# Altium PCB PCB1.PcbDoc (part 2 of 3)
Units mm, origin at the board's own origin, x right, y up, seen from the top; angles counter-clockwise.
Board outline 21.72 x 226.57 mm, 2 copper layers (Top Layer, Bottom Layer); 37 components, 26 nets, 124 pads, 11 vias.
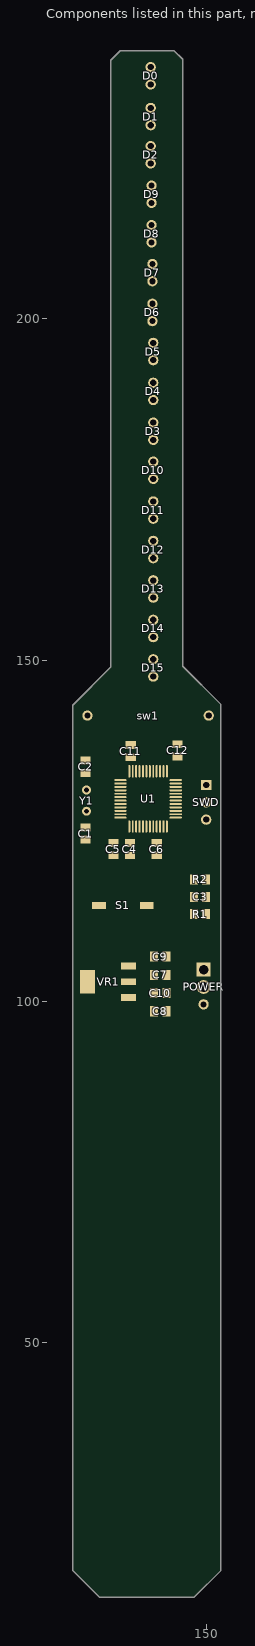
[diagram p2: the components of this part, seen from the top]

## Via types
v1: diameter 0.508, hole 0.305, Top Layer to Bottom Layer, 11 vias

## Nets (pads, with @x,y where several pads share a name; then routed paths per layer and width w, separated by ;. In a path a pad name is that pad's centre, name@x,y a point inside that pad or via, vN(x,y) a via of type N, cw(c..) or ccw(c..) an arc to the next point about the centre after c; other vN are vias at no path point) (continued)
copper on no net: (continued)
  Top Layer w0.076: 135.153,69.139 136.22,69.139 ; 135.153,69.215 136.144,69.215 ; 135.153,69.291 136.144,69.291 ; 135.153,69.367 136.144,69.367 ; 135.153,69.444 136.068,69.444 ; 135.153,69.52 136.068,69.52 ; 135.153,69.596 135.915,69.596 ; 135.153,69.672 135.915,69.672 ; 135.153,69.748 135.839,69.748 ; 135.153,69.825 135.839,69.825 ; 135.153,69.901 135.763,69.901 ; 135.153,69.977 135.763,69.977 ; 135.153,70.053 135.763,70.053 ; 135.23,68.91 136.22,68.91 ; 135.23,68.986 136.22,68.986 ; 135.23,69.063 136.22,69.063 ; 135.23,70.129 135.763,70.129 ; 135.23,70.206 135.763,70.206 ; 135.23,70.282 135.763,70.282 ; 135.306,68.682 136.22,68.682 ; 135.306,68.758 136.22,68.758 ; 135.306,68.834 136.22,68.834 ; 135.306,70.358 135.763,70.358 ; 135.306,70.434 135.763,70.434 ; 135.306,70.51 135.763,70.51 ; 135.306,70.587 135.763,70.587 ; 135.306,70.663 135.763,70.663 ; 135.382,68.529 136.22,68.529 ; 135.382,68.605 136.22,68.605 ; 135.382,70.739 135.763,70.739 ; 135.382,70.815 135.763,70.815 ; 135.458,68.377 136.22,68.377 ; 135.458,68.453 136.22,68.453 ; 135.458,70.891 135.763,70.891 ; 135.458,70.968 135.763,70.968 ; 135.458,71.044 135.763,71.044 ; 135.534,68.301 136.22,68.301 ; 135.534,71.12 135.687,71.12 ; 135.611,68.224 136.22,68.224 ; 135.611,71.196 135.687,71.196 ; 135.687,68.072 136.373,68.072 ; 135.687,68.148 136.296,68.148 ; 135.763,67.92 136.373,67.92 ; 135.763,67.996 136.373,67.996 ; 135.915,67.615 136.754,67.615 ; 135.915,67.691 136.677,67.691 ; 135.915,67.767 136.525,67.767 ; 135.915,67.843 136.525,67.843 ; 135.992,67.462 136.982,67.462 ; 135.992,67.539 136.906,67.539 ; 135.992,70.129 136.068,70.129 ; 135.992,70.206 136.068,70.206 ; 135.992,70.282 136.068,70.282 ; 135.992,70.358 136.068,70.358 ; 135.992,70.434 136.144,70.434 ; 135.992,70.51 136.144,70.51 ; 135.992,70.587 136.22,70.587 ; 135.992,70.663 136.22,70.663 ; 135.992,70.739 136.22,70.739 ; 135.992,70.815 136.22,70.815 ; 135.992,70.891 136.296,70.891 ; 135.992,70.968 136.296,70.968 ; 135.992,71.044 136.373,71.044 ; 135.992,71.12 136.373,71.12 ; 135.992,71.196 136.373,71.196 ; 135.992,71.272 136.449,71.272 ; 135.992,71.349 136.525,71.349 ; 136.068,67.234 137.82,67.234 ; 136.068,67.31 137.668,67.31 ; 136.068,67.386 137.363,67.386 ; 136.068,71.425 136.525,71.425 ; 136.068,71.501 136.525,71.501 ; 136.068,71.577 136.601,71.577 ; 136.068,71.653 136.677,71.653 ; 136.068,71.73 136.754,71.73 ; 136.068,71.806 136.754,71.806 ; 136.068,71.882 136.754,71.882 ; 136.068,71.958 136.83,71.958 ; 136.068,72.034 136.83,72.034 ; 136.144,67.081 137.973,67.081 ; 136.144,67.158 137.897,67.158 ; 136.144,72.111 136.906,72.111 ; 136.144,72.187 136.906,72.187 ; 136.144,72.263 136.906,72.263 ; 136.22,66.929 138.125,66.929 ; 136.22,67.005 138.049,67.005 ; 136.22,69.748 137.211,69.748 ; 136.22,69.825 137.211,69.825 ; 136.22,69.901 137.211,69.901 ; 136.22,69.977 137.211,69.977 ; 136.22,70.053 137.211,70.053 ; 136.22,70.129 137.211,70.129 ; 136.22,70.206 137.135,70.206 ; 136.22,70.282 137.135,70.282 ; 136.22,72.339 136.982,72.339 ; 136.22,72.415 137.058,72.415 ; 136.22,72.492 137.058,72.492 ; 136.22,72.568 137.135,72.568 ; 136.296,66.853 138.278,66.853 ; 136.296,68.529 137.135,68.529 ; 136.296,68.605 137.135,68.605 ; 136.296,68.682 137.135,68.682 ; 136.296,68.758 137.135,68.758 ; 136.296,68.834 137.135,68.834 ; 136.296,68.91 137.135,68.91 ; 136.296,69.444 137.135,69.444 ; 136.296,69.52 137.135,69.52 ; 136.296,69.596 137.135,69.596 ; 136.296,69.672 137.135,69.672 ; 136.296,70.358 137.211,70.358 ; 136.296,70.434 137.211,70.434 ; 136.296,70.51 137.211,70.51 ; 136.296,72.644 137.211,72.644 ; 136.373,66.7 138.582,66.7 ; 136.373,66.777 138.43,66.777 ; 136.373,68.148 137.211,68.148 ; 136.373,68.224 137.211,68.224 ; 136.373,68.301 137.211,68.301 ; 136.373,68.377 137.211,68.377 ; 136.373,68.453 137.135,68.453 ; 136.373,68.986 137.135,68.986 ; 136.373,69.063 137.135,69.063 ; 136.373,69.139 137.135,69.139 ; 136.373,69.215 137.135,69.215 ; 136.373,69.291 137.135,69.291 ; 136.373,69.367 137.135,69.367 ; 136.373,70.587 137.211,70.587 ; 136.373,70.663 137.211,70.663 ; 136.373,70.739 137.287,70.739 ; 136.373,70.815 137.363,70.815 ; 136.373,70.891 137.363,70.891 ; 136.373,72.72 137.211,72.72 ; 136.373,72.796 137.363,72.796 ; 136.373,72.873 137.439,72.873 ; 136.449,66.548 139.04,66.548 ; 136.449,66.624 138.887,66.624 ; 136.449,68.072 137.211,68.072 ; 136.449,70.968 137.439,70.968 ; 136.449,71.044 137.516,71.044 ; 136.449,72.949 137.592,72.949 ; 136.525,66.472 139.344,66.472 ; 136.525,67.92 137.211,67.92 ; 136.525,67.996 137.211,67.996 ; 136.525,71.12 137.592,71.12 ; 136.525,71.196 137.668,71.196 ; 136.525,71.272 137.744,71.272 ; 136.525,73.025 137.668,73.025 ; 136.525,73.101 137.82,73.101 ; 136.525,73.177 137.897,73.177 ; 136.601,66.396 139.497,66.396 ; 136.601,67.843 137.287,67.843 ; 136.601,71.349 137.82,71.349 ; 136.677,66.319 139.878,66.319 ; 136.677,67.767 137.287,67.767 ; 136.677,71.425 137.973,71.425 ; 136.677,73.254 138.049,73.254 ; 136.677,73.33 138.125,73.33 ; 136.754,66.243 140.868,66.243 ; 136.754,67.691 137.363,67.691 ; 136.754,71.501 138.049,71.501 ; 136.754,71.577 138.125,71.577 ; 136.754,73.406 138.201,73.406 ; 136.754,73.482 138.278,73.482 ; 136.83,66.167 140.564,66.167 ; 136.83,67.615 137.439,67.615 ; 136.83,71.653 138.201,71.653 ; 136.83,73.558 138.43,73.558 ; 136.906,66.091 140.411,66.091 ; 136.906,71.73 138.278,71.73 ; 136.906,71.806 138.278,71.806 ; 136.906,71.882 138.43,71.882 ; 136.906,71.958 138.43,71.958 ; 136.906,73.635 138.43,73.635 ; 136.906,73.711 138.582,73.711 ; 136.982,67.539 137.516,67.539 ; 136.982,72.034 138.582,72.034 ; 136.982,73.787 138.582,73.787 ; 137.058,65.938 139.954,65.938 ; 137.058,66.015 140.106,66.015 ; 137.058,67.462 137.516,67.462 ; 137.058,72.111 138.735,72.111 ; 137.058,72.187 139.04,72.187 ; 137.058,73.863 138.735,73.863 ; 137.058,73.939 138.811,73.939 ; 137.135,72.263 139.192,72.263 ; 137.135,74.016 139.192,74.016 ; 137.211,68.529 140.945,68.529 ; 137.211,68.605 140.945,68.605 ; 137.211,68.682 140.106,68.682 ; 137.211,68.758 139.954,68.758 ; 137.211,68.834 139.649,68.834 ; 137.211,68.91 139.497,68.91 ; 137.211,68.986 139.04,68.986 ; 137.211,69.063 138.963,69.063 ; 137.211,69.139 138.735,69.139 ; 137.211,69.215 138.659,69.215 ; 137.211,72.339 139.421,72.339 ; 137.211,72.415 139.497,72.415 ; 137.211,74.092 139.268,74.092 ; 137.287,65.862 139.802,65.862 ; 137.287,68.224 140.792,68.224 ; 137.287,68.301 140.792,68.301 ; 137.287,68.377 140.868,68.377 ; 137.287,68.453 140.868,68.453 ; 137.287,69.291 138.506,69.291 ; 137.287,69.367 138.43,69.367 ; 137.287,69.444 138.278,69.444 ; 137.287,69.52 138.278,69.52 ; 137.287,69.596 138.125,69.596 ; 137.287,69.672 138.125,69.672 ; 137.287,69.748 138.125,69.748 ; 137.287,69.825 138.125,69.825 ; 137.287,69.901 138.049,69.901 ; 137.287,69.977 138.049,69.977 ; 137.287,70.053 138.049,70.053 ; 137.287,70.129 137.973,70.129 ; 137.287,70.206 137.973,70.206 ; 137.287,70.282 137.973,70.282 ; 137.287,70.358 137.973,70.358 ; 137.287,70.434 137.973,70.434 ; 137.287,72.492 139.725,72.492 ; 137.287,74.168 139.421,74.168 ; 137.363,65.786 139.649,65.786 ; 137.363,67.92 140.564,67.92 ; 137.363,67.996 140.564,67.996 ; 137.363,68.072 140.716,68.072 ; 137.363,68.148 140.716,68.148 ; 137.363,70.51 137.973,70.51 ; 137.363,70.587 137.973,70.587 ; 137.363,70.663 137.973,70.663 ; 137.363,70.739 137.973,70.739 ; 137.363,72.568 139.802,72.568 ; 137.363,74.244 139.497,74.244 ; 137.439,67.843 140.411,67.843 ; 137.439,72.644 140.106,72.644 ; 137.516,67.767 140.411,67.767 ; 137.516,70.815 137.973,70.815 ; 137.516,70.891 137.973,70.891 ; 137.516,72.72 142.088,72.72 ; 137.516,74.32 139.573,74.32 ; 137.516,74.397 139.649,74.397 ; 137.516,86.284 137.744,86.284 ; 137.516,86.36 137.744,86.36 ; 137.592,67.691 139.421,67.691 ; 137.592,86.131 137.744,86.131 ; 137.592,86.208 137.744,86.208 ; 137.592,86.436 137.744,86.436 ; 137.592,86.512 137.82,86.512 ; 137.592,86.589 137.82,86.589 ; 137.668,65.71 139.497,65.71 ; 137.668,67.615 139.192,67.615 ; 137.668,70.968 137.973,70.968 ; 137.668,71.044 137.973,71.044 ; 137.668,72.796 142.088,72.796 ; 137.668,85.598 137.82,85.598 ; 137.668,85.674 137.82,85.674 ; 137.668,85.75 137.82,85.75 ; 137.668,85.827 137.82,85.827 ; 137.668,85.903 137.744,85.903 ; 137.668,85.979 137.744,85.979 ; 137.668,86.055 137.744,86.055 ; 137.668,86.665 137.82,86.665 ; 137.668,86.741 137.897,86.741 ; 137.668,86.817 137.897,86.817 ; 137.744,72.873 142.088,72.873 ; 137.744,85.293 137.82,85.293 ; 137.744,85.369 137.82,85.369 ; 137.744,85.446 137.82,85.446 ; 137.744,85.522 137.82,85.522 ; 137.744,86.893 137.973,86.893 ; 137.82,65.634 139.421,65.634 ; 137.82,67.539 138.278,67.539 ; 137.82,71.12 137.973,71.12 ; 137.82,72.949 142.011,72.949 ; 137.82,74.473 139.878,74.473 ; 137.82,85.141 137.897,85.141 ; 137.82,85.217 137.897,85.217 ; 137.82,86.97 137.973,86.97 ; 137.82,87.046 137.973,87.046 ; 137.897,71.196 137.973,71.196 ; 137.897,73.025 141.935,73.025 ; 137.897,85.065 137.973,85.065 ; 137.897,87.122 138.049,87.122 ; 137.973,74.549 139.04,74.549 ; 137.973,84.988 138.049,84.988 ; 137.973,87.198 138.125,87.198 ; 138.049,73.101 141.935,73.101 ; 138.049,87.274 138.125,87.274 ; 138.125,67.081 142.24,67.081 ; 138.125,67.158 142.24,67.158 ; 138.125,67.234 142.316,67.234 ; 138.125,70.663 138.201,70.663 ; 138.125,70.739 138.201,70.739 ; 138.125,70.815 138.278,70.815 ; 138.125,70.891 138.278,70.891 ; 138.125,70.968 138.278,70.968 ; 138.125,71.044 138.43,71.044 ; 138.125,71.12 138.582,71.12 ; 138.125,73.177 141.935,73.177 ; 138.125,84.912 138.201,84.912 ; 138.125,85.446 138.278,85.446 ; 138.125,85.522 138.278,85.522 ; 138.125,85.598 138.278,85.598 ; 138.125,85.674 138.278,85.674 ; 138.125,85.75 138.201,85.75 ; 138.125,85.827 138.201,85.827 ; 138.125,85.903 138.201,85.903 ; 138.125,85.979 138.201,85.979 ; 138.125,86.055 138.201,86.055 ; 138.125,86.131 138.201,86.131 ; 138.125,86.208 138.201,86.208 ; 138.125,86.284 138.201,86.284 ; 138.125,86.36 138.201,86.36 ; 138.125,86.436 138.278,86.436 ; 138.125,87.351 138.278,87.351 ; 138.201,65.557 139.192,65.557 ; 138.201,67.005 142.164,67.005 ; 138.201,67.31 142.392,67.31 ; 138.201,69.901 139.116,69.901 ; 138.201,69.977 139.116,69.977 ; 138.201,70.053 139.04,70.053 ; 138.201,70.129 139.04,70.129 ; 138.201,70.206 139.04,70.206 ; 138.201,70.282 139.04,70.282 ; 138.201,71.196 138.735,71.196 ; 138.201,71.272 138.887,71.272 ; 138.201,73.254 141.859,73.254 ; 138.201,85.217 138.278,85.217 ; 138.201,85.293 138.278,85.293 ; 138.201,85.369 138.278,85.369 ; 138.201,86.512 138.278,86.512 ; 138.201,87.427 138.278,87.427 ; 138.278,69.748 139.192,69.748 ; 138.278,69.825 139.192,69.825 ; 138.278,70.358 139.04,70.358 ; 138.278,70.434 139.04,70.434 ; 138.278,70.51 139.04,70.51 ; 138.278,70.587 139.116,70.587 ; 138.278,70.663 139.116,70.663 ; 138.278,71.349 138.963,71.349 ; 138.278,71.425 139.116,71.425 ; 138.278,73.33 141.783,73.33 ; 138.278,85.065 138.43,85.065 ; 138.278,85.141 138.354,85.141 ; 138.278,86.589 138.354,86.589 ; 138.278,86.665 138.582,86.665 ; 138.278,87.503 138.354,87.503 ; 138.354,66.929 142.088,66.929 ; 138.354,69.672 139.497,69.672 ; 138.354,70.739 139.116,70.739 ; 138.354,70.815 139.268,70.815 ; 138.354,71.501 139.192,71.501 ; 138.354,84.836 138.735,84.836 ; 138.354,84.988 138.43,84.988 ; 138.354,86.741 138.582,86.741 ; 138.354,87.579 138.43,87.579 ; 138.43,66.853 142.011,66.853 ; 138.43,69.596 139.497,69.596 ; 138.43,70.891 139.344,70.891 ; 138.43,71.577 139.344,71.577 ; 138.43,73.406 141.554,73.406 ; 138.43,73.482 141.326,73.482 ; 138.43,84.912 138.887,84.912 ; 138.43,86.208 138.582,86.208 ; 138.43,86.284 138.582,86.284 ; 138.43,86.36 138.582,86.36 ; 138.43,86.436 138.582,86.436 ; 138.43,86.512 138.506,86.512 ; 138.43,86.589 138.506,86.589 ; 138.43,86.817 138.582,86.817 ; 138.43,87.655 138.506,87.655 ; 138.506,65.481 138.963,65.481 ; 138.506,69.444 139.573,69.444 ; 138.506,69.52 139.497,69.52 ; 138.506,71.653 139.344,71.653 ; 138.506,86.055 138.582,86.055 ; 138.506,86.131 138.582,86.131 ; 138.506,86.893 138.659,86.893 ; 138.506,87.732 138.582,87.732 ; 138.582,67.386 142.392,67.386 ; 138.582,70.968 139.497,70.968 ; 138.582,71.73 139.573,71.73 ; 138.582,73.558 140.335,73.558 ; 138.582,85.903 138.735,85.903 ; 138.582,85.979 138.659,85.979 ; 138.582,86.512 138.735,86.512 ; 138.582,86.589 138.735,86.589 ; 138.582,86.97 138.811,86.97 ; 138.582,87.808 138.735,87.808 ; 138.659,66.777 141.859,66.777 ; 138.659,71.044 139.497,71.044 ; 138.659,71.806 139.725,71.806 ; 138.659,73.635 139.954,73.635 ; 138.659,84.76 138.811,84.76 ; 138.659,87.046 138.963,87.046 ; 138.659,87.884 138.887,87.884 ; 138.735,69.367 140.335,69.367 ; 138.735,84.684 138.887,84.684 ; 138.735,85.827 138.887,85.827 ; 138.735,86.665 138.887,86.665 ; 138.735,87.96 138.811,87.96 ; 138.811,66.7 141.783,66.7 ; 138.811,69.291 140.335,69.291 ; 138.811,71.12 139.649,71.12 ; 138.811,84.988 139.192,84.988 ; 138.811,85.75 139.04,85.75 ; 138.887,71.196 140.03,71.196 ; 138.887,71.882 141.935,71.882 ; 138.887,73.711 139.497,73.711 ; 138.887,86.741 138.963,86.741 ; 138.887,87.122 139.116,87.122 ; 138.963,69.215 140.335,69.215 ; 138.963,86.131 139.04,86.131 ; 138.963,86.208 139.04,86.208 ; 138.963,86.284 139.04,86.284 ; 138.963,86.36 139.192,86.36 ; 138.963,86.436 139.192,86.436 ; 138.963,86.817 139.04,86.817 ; 138.963,87.198 139.192,87.198 ; 139.04,66.624 141.63,66.624 ; 139.04,69.139 140.259,69.139 ; 139.04,71.272 140.868,71.272 ; 139.04,71.958 141.935,71.958 ; 139.04,84.607 139.344,84.607 ; 139.04,85.065 139.573,85.065 ; 139.04,86.055 139.268,86.055 ; 139.04,86.512 139.192,86.512 ; 139.04,86.589 139.192,86.589 ; 139.04,86.893 139.116,86.893 ; 139.116,71.349 140.792,71.349 ; 139.116,85.674 140.03,85.674 ; 139.116,86.208 139.268,86.208 ; 139.116,86.284 139.192,86.284 ; 139.116,87.274 139.421,87.274 ; 139.116,87.808 139.421,87.808 ; 139.192,66.548 140.259,66.548 ; 139.192,67.462 142.545,67.462 ; 139.192,69.063 140.183,69.063 ; 139.192,69.977 139.497,69.977 ; 139.192,70.053 139.497,70.053 ; 139.192,70.129 139.497,70.129 ; 139.192,70.206 139.421,70.206 ; 139.192,70.282 139.421,70.282 ; 139.192,70.358 139.421,70.358 ; 139.192,70.434 139.421,70.434 ; 139.192,70.51 139.344,70.51 ; 139.192,70.587 139.344,70.587 ; 139.192,84.531 139.802,84.531 ; 139.192,85.903 139.649,85.903 ; 139.192,85.979 139.344,85.979 ; 139.192,86.131 139.344,86.131 ; 139.192,86.665 139.725,86.665 ; 139.192,86.97 139.573,86.97 ; 139.192,87.351 140.411,87.351 ; 139.268,69.901 139.497,69.901 ; 139.268,70.663 139.344,70.663 ; 139.268,70.739 139.344,70.739 ; 139.268,71.425 140.716,71.425 ; 139.344,68.986 140.106,68.986 ; 139.344,71.501 140.716,71.501 ; 139.344,72.034 141.935,72.034 ; 139.344,73.863 143.002,73.863 ; 139.344,73.939 142.926,73.939 ; 139.344,74.016 142.85,74.016 ; 139.344,86.589 139.421,86.589 ; 139.344,86.741 139.573,86.741 ; 139.421,69.825 139.497,69.825 ; 139.421,74.549 139.954,74.549 ; 139.421,85.141 139.954,85.141 ; 139.421,85.598 139.802,85.598 ; 139.421,86.208 139.497,86.208 ; 139.421,86.512 139.649,86.512 ; 139.497,66.472 140.03,66.472 ; 139.497,70.434 140.487,70.434 ; 139.497,70.51 140.487,70.51 ; 139.497,70.587 140.411,70.587 ; 139.497,70.663 140.259,70.663 ; 139.497,70.739 140.259,70.739 ; 139.497,70.815 140.106,70.815 ; 139.497,70.891 140.03,70.891 ; 139.497,71.577 140.487,71.577 ; 139.497,72.111 141.935,72.111 ; 139.497,74.092 142.773,74.092 ; 139.497,85.75 139.649,85.75 ; 139.497,85.827 139.649,85.827 ; 139.497,85.979 139.725,85.979 ; 139.497,86.284 139.649,86.284 ; 139.573,69.748 140.64,69.748 ; 139.573,70.282 140.411,70.282 ; 139.573,70.358 140.411,70.358 ; 139.573,84.607 140.03,84.607 ; 139.573,86.36 139.649,86.36 ; 139.573,86.436 139.649,86.436 ; 139.573,86.589 140.03,86.589 ; 139.649,69.596 140.411,69.596 ; 139.649,69.672 140.487,69.672 ; 139.649,69.825 140.716,69.825 ; 139.649,70.129 140.183,70.129 ; 139.649,70.206 140.335,70.206 ; 139.649,70.968 140.335,70.968 ; 139.649,71.653 140.411,71.653 ; 139.649,72.187 141.935,72.187 ; 139.649,73.787 143.002,73.787 ; 139.649,74.168 142.697,74.168 ; 139.649,85.217 139.954,85.217 ; 139.649,86.055 139.802,86.055 ; 139.649,86.131 139.802,86.131 ; 139.649,86.817 139.802,86.817 ; 139.649,86.893 139.725,86.893 ; 139.725,70.053 140.106,70.053 ; 139.725,71.044 139.802,71.044 ; 139.725,72.263 141.859,72.263 ; 139.725,74.244 142.697,74.244 ; 139.725,86.208 139.878,86.208 ; 139.725,86.512 139.878,86.512 ; 139.802,69.52 140.259,69.52 ; 139.802,85.293 139.878,85.293 ; 139.802,85.369 139.878,85.369 ; 139.802,85.446 139.954,85.446 ; 139.802,85.75 140.03,85.75 ; 139.802,86.284 139.878,86.284 ; 139.802,86.36 139.878,86.36 ; 139.802,86.436 139.878,86.436 ; 139.802,86.665 139.954,86.665 ; 139.802,86.741 139.878,86.741 ; 139.878,69.444 140.106,69.444 ; 139.878,85.522 139.954,85.522 ; 139.878,85.598 139.954,85.598 ; 139.878,87.808 140.335,87.808 ; 139.954,66.319 140.945,66.319 ; 139.954,69.901 140.792,69.901 ; 139.954,71.044 140.106,71.044 ; 139.954,72.339 141.402,72.339 ; 139.954,73.711 143.078,73.711 ; 139.954,74.32 142.545,74.32 ; 139.954,74.397 142.545,74.397 ; 139.954,85.293 140.183,85.293 ; 139.954,85.827 140.106,85.827 ; 139.954,86.512 140.106,86.512 ; 139.954,87.274 140.411,87.274 ; 140.03,69.977 140.792,69.977 ; 140.03,85.903 140.106,85.903 ; 140.03,85.979 140.106,85.979 ; 140.03,86.36 140.259,86.36 ; 140.03,86.436 140.259,86.436 ; 140.03,87.732 140.183,87.732 ; 140.106,70.891 140.411,70.891 ; 140.106,72.415 141.097,72.415 ; 140.106,74.473 142.392,74.473 ; 140.106,84.684 140.259,84.684 ; 140.106,85.369 140.259,85.369 ; 140.106,86.131 140.183,86.131 ; 140.106,86.208 140.259,86.208 ; 140.106,86.284 140.259,86.284 ; 140.106,87.198 140.259,87.198 ; 140.106,87.579 140.259,87.579 ; 140.106,87.655 140.259,87.655 ; 140.183,70.815 140.487,70.815 ; 140.183,86.97 140.259,86.97 ; 140.183,87.046 140.259,87.046 ; 140.183,87.122 140.259,87.122 ; 140.183,87.427 140.335,87.427 ; 140.183,87.503 140.259,87.503 ; 140.259,66.396 140.716,66.396 ; 140.259,74.549 142.392,74.549 ; 140.259,84.76 140.411,84.76 ; 140.259,87.732 140.487,87.732 ; 140.335,68.986 141.097,68.986 ; 140.335,69.063 141.173,69.063 ; 140.335,70.053 140.868,70.053 ; 140.335,70.739 140.487,70.739 ; 140.335,71.806 142.011,71.806 ; 140.335,80.874 140.487,80.874 ; 140.335,80.95 140.487,80.95 ; 140.335,81.026 140.487,81.026 ; 140.335,81.102 140.487,81.102 ; 140.335,81.178 140.487,81.178 ; 140.335,81.255 140.487,81.255 ; 140.335,81.331 140.487,81.331 ; 140.335,85.446 140.487,85.446 ; 140.411,65.938 142.621,65.938 ; 140.411,67.539 142.545,67.539 ; 140.411,68.91 140.792,68.91 ; 140.411,69.139 141.249,69.139 ; 140.411,69.215 141.326,69.215 ; 140.411,70.129 140.868,70.129 ; 140.411,71.196 140.945,71.196 ; 140.411,80.645 140.564,80.645 ; 140.411,80.721 140.564,80.721 ; 140.411,80.797 140.487,80.797 ; 140.411,81.407 140.487,81.407 ; 140.411,81.483 140.487,81.483 ; 140.411,81.559 140.564,81.559 ; 140.411,81.636 140.564,81.636 ; 140.411,81.712 140.564,81.712 ; 140.411,84.836 140.564,84.836 ; 140.411,84.912 140.564,84.912 ; 140.411,85.522 140.564,85.522 ; 140.411,87.122 140.564,87.122 ; 140.411,87.198 140.564,87.198 ; 140.487,71.12 140.945,71.12 ; 140.487,71.73 142.011,71.73 ; 140.487,80.569 140.564,80.569 ; 140.487,81.788 140.564,81.788 ; 140.487,81.864 140.564,81.864 ; 140.487,81.94 140.64,81.94 ; 140.487,82.017 140.64,82.017 ; 140.487,82.093 140.64,82.093 ; 140.487,82.169 140.64,82.169 ; 140.487,82.245 140.64,82.245 ; 140.487,82.321 140.64,82.321 ; 140.487,82.398 140.64,82.398 ; 140.487,86.97 140.564,86.97 ; 140.487,87.046 140.564,87.046 ; 140.487,87.655 140.716,87.655 ; 140.564,66.015 142.697,66.015 ; 140.564,66.548 141.478,66.548 ; 140.564,69.291 141.326,69.291 ; 140.564,69.367 141.326,69.367 ; 140.564,70.206 140.868,70.206 ; 140.564,70.282 140.868,70.282 ; 140.564,70.358 140.868,70.358 ; 140.564,70.434 140.868,70.434 ; 140.564,80.416 140.716,80.416 ; 140.564,80.493 140.64,80.493 ; 140.564,82.474 140.716,82.474 ; 140.564,82.55 140.716,82.55 ; 140.564,82.626 140.716,82.626 ; 140.564,84.988 140.868,84.988 ; 140.564,85.065 140.716,85.065 ; 140.564,85.598 140.868,85.598 ; 140.564,85.674 140.868,85.674 ; 140.564,86.665 140.716,86.665 ; 140.564,86.741 140.64,86.741 ; 140.564,86.817 140.64,86.817 ; 140.564,86.893 140.64,86.893 ; 140.564,87.579 140.868,87.579 ; 140.64,69.444 141.402,69.444 ; 140.64,69.52 141.478,69.52 ; 140.64,70.51 140.868,70.51 ; 140.64,70.587 140.868,70.587 ; 140.64,70.663 140.792,70.663 ; 140.64,70.739 140.792,70.739 ; 140.64,71.044 141.021,71.044 ; 140.64,71.653 142.011,71.653 ; 140.64,74.625 142.088,74.625 ; 140.64,80.34 140.716,80.34 ; 140.64,82.702 140.792,82.702 ; 140.64,84.836 140.868,84.836 ; 140.64,84.912 140.868,84.912 ; 140.64,85.141 140.792,85.141 ; 140.64,85.75 140.868,85.75 ; 140.64,85.827 140.868,85.827 ; 140.64,86.36 140.716,86.36 ; 140.64,86.436 140.716,86.436 ; 140.64,86.512 140.716,86.512 ; 140.64,86.589 140.716,86.589 ; 140.716,67.843 140.868,67.843 ; 140.716,69.596 141.478,69.596 ; 140.716,71.577 142.011,71.577 ; 140.716,72.644 142.088,72.644 ; 140.716,80.188 140.868,80.188 ; 140.716,80.264 140.792,80.264 ; 140.716,82.779 140.868,82.779 ; 140.716,82.855 140.868,82.855 ; 140.716,84.379 140.945,84.379 ; 140.716,84.455 140.868,84.455 ; 140.716,84.531 140.868,84.531 ; 140.716,84.607 140.868,84.607 ; 140.716,84.684 140.868,84.684 ; 140.716,84.76 140.868,84.76 ; 140.716,85.217 140.868,85.217 ; 140.716,85.293 140.945,85.293 ; 140.716,85.369 140.868,85.369 ; 140.716,85.446 140.868,85.446 ; 140.716,85.522 140.868,85.522 ; 140.716,85.903 140.868,85.903 ; 140.716,85.979 140.868,85.979 ; 140.716,86.055 140.792,86.055 ; 140.716,86.131 140.792,86.131 ; 140.716,86.208 140.792,86.208 ; 140.716,86.284 140.792,86.284 ; 140.716,87.503 141.021,87.503 ; 140.792,67.92 141.173,67.92 ; 140.792,67.996 141.326,67.996 ; 140.792,68.682 141.021,68.682 ; 140.792,70.968 141.021,70.968 ; 140.792,71.501 142.011,71.501 ; 140.792,80.112 140.945,80.112 ; 140.792,82.931 140.945,82.931 ; 140.792,84.226 140.945,84.226 ; 140.792,84.303 140.945,84.303 ; 140.792,85.065 140.868,85.065 ; 140.792,87.427 141.021,87.427 ; 140.868,67.615 142.621,67.615 ; 140.868,68.072 141.63,68.072 ; 140.868,68.148 141.783,68.148 ; 140.868,68.224 142.088,68.224 ; 140.868,68.758 141.021,68.758 ; 140.868,69.672 141.478,69.672 ; 140.868,71.425 142.011,71.425 ; 140.868,80.035 141.021,80.035 ; 140.868,81.483 140.945,81.483 ; 140.868,81.559 140.945,81.559 ; 140.868,81.636 140.945,81.636 ; 140.868,81.712 140.945,81.712 ; 140.868,81.788 140.945,81.788 ; 140.868,81.864 140.945,81.864 ; 140.868,81.94 141.021,81.94 ; 140.868,83.007 141.021,83.007 ; 140.868,83.617 141.097,83.617 ; 140.868,83.693 141.021,83.693 ; 140.868,83.769 141.021,83.769 ; 140.868,83.845 141.021,83.845 ; 140.868,83.922 141.021,83.922 ; 140.868,83.998 141.021,83.998 ; 140.868,84.074 141.021,84.074 ; 140.868,84.15 140.945,84.15 ; 140.868,87.274 141.097,87.274 ; 140.868,87.351 141.097,87.351 ; 140.945,66.091 142.926,66.091 ; 140.945,68.301 142.164,68.301 ; 140.945,69.748 141.554,69.748 ; 140.945,71.349 142.697,71.349 ; 140.945,74.701 141.935,74.701 ; 140.945,79.959 141.097,79.959 ; 140.945,81.331 141.021,81.331 ; 140.945,81.407 141.021,81.407 ; 140.945,82.017 141.021,82.017 ; 140.945,83.083 141.097,83.083 ; 140.945,83.236 141.021,83.236 ; 140.945,83.312 141.173,83.312 ; 140.945,83.388 141.173,83.388 ; 140.945,83.464 141.097,83.464 ; 140.945,83.541 141.097,83.541 ; 140.945,85.369 141.021,85.369 ; 141.021,67.691 142.621,67.691 ; 141.021,68.377 142.316,68.377 ; 141.021,68.453 142.392,68.453 ; 141.021,69.825 141.554,69.825 ; 141.021,69.901 141.63,69.901 ; 141.021,69.977 141.63,69.977 ; 141.021,70.053 141.554,70.053 ; 141.021,70.815 141.097,70.815 ; 141.021,71.272 142.697,71.272 ; 141.021,81.255 141.097,81.255 ; 141.021,82.093 141.097,82.093 ; 141.021,82.169 141.173,82.169 ; 141.021,85.446 141.097,85.446 ; 141.021,85.522 141.173,85.522 ; 141.021,87.122 141.173,87.122 ; 141.021,87.198 141.173,87.198 ; 141.097,42.697 141.249,42.697 ; 141.097,42.774 141.326,42.774 ; 141.097,42.85 141.326,42.85 ; 141.097,42.926 141.402,42.926 ; 141.097,43.002 141.478,43.002 ; 141.097,43.078 141.478,43.078 ; 141.097,43.155 141.478,43.155 ; 141.097,66.167 143.002,66.167 ; 141.097,68.529 142.545,68.529 ; 141.097,68.605 142.545,68.605 ; 141.097,70.129 141.554,70.129 ; 141.097,70.206 141.478,70.206 ; 141.097,70.282 141.478,70.282 ; 141.097,70.358 141.478,70.358 ; 141.097,70.434 141.402,70.434 ; 141.097,70.51 141.326,70.51 ; 141.097,70.587 141.326,70.587 ; 141.097,70.663 141.249,70.663 ; 141.097,70.739 141.173,70.739 ; 141.097,71.12 142.697,71.12 ; 141.097,73.635 143.154,73.635 ; 141.097,79.883 141.326,79.883 ; 141.097,81.178 141.326,81.178 ; 141.097,82.245 141.173,82.245 ; 141.097,82.321 141.249,82.321 ; 141.097,83.16 141.173,83.16 ; 141.097,85.598 141.173,85.598 ; 141.097,85.674 141.173,85.674 ; 141.097,85.75 141.173,85.75 ; 141.097,87.046 141.249,87.046 ; 141.173,43.231 141.478,43.231 ; 141.173,43.307 141.478,43.307 ; 141.173,43.383 141.478,43.383 ; 141.173,43.459 141.478,43.459 ; 141.173,43.536 141.478,43.536 ; 141.173,43.612 141.478,43.612 ; 141.173,43.688 141.478,43.688 ; 141.173,43.764 141.478,43.764 ; 141.173,43.84 141.478,43.84 ; 141.173,43.917 141.478,43.917 ; 141.173,67.767 142.697,67.767 ; 141.173,68.682 142.621,68.682 ; 141.173,68.758 142.697,68.758 ; 141.173,71.044 142.697,71.044 ; 141.173,79.807 141.707,79.807 ; 141.173,81.026 141.478,81.026 ; 141.173,81.102 141.402,81.102 ; 141.173,81.255 141.326,81.255 ; 141.173,81.331 141.326,81.331 ; 141.173,81.407 141.249,81.407 ; 141.173,81.483 141.326,81.483 ; 141.173,81.559 141.326,81.559 ; 141.173,82.398 141.326,82.398 ; 141.173,82.474 141.326,82.474 ; 141.173,82.55 141.402,82.55 ; 141.173,82.626 141.478,82.626 ; 141.173,82.702 141.478,82.702 ; 141.173,82.779 141.554,82.779 ; 141.173,83.236 141.326,83.236 ; 141.173,85.827 141.249,85.827 ; 141.173,85.903 141.249,85.903 ; 141.173,85.979 141.249,85.979 ; 141.173,86.055 141.326,86.055 ; 141.173,86.131 141.326,86.131 ; 141.173,86.208 141.326,86.208 ; 141.173,86.817 141.326,86.817 ; 141.173,86.893 141.326,86.893 ; 141.173,86.97 141.249,86.97 ; 141.249,43.993 141.478,43.993 ; 141.249,44.069 141.478,44.069 ; 141.249,44.145 141.478,44.145 ; 141.249,44.221 141.478,44.221 ; 141.249,44.298 141.478,44.298 ; 141.249,44.374 141.478,44.374 ; 141.249,44.45 141.478,44.45 ; 141.249,70.968 142.773,70.968 ; 141.249,72.568 142.088,72.568 ; 141.249,80.721 141.326,80.721 ; 141.249,80.797 141.326,80.797 ; 141.249,80.874 141.326,80.874 ; 141.249,80.95 141.63,80.95 ; 141.249,81.636 141.326,81.636 ; 141.249,82.855 141.63,82.855 ; 141.249,86.284 141.326,86.284 ; 141.249,86.36 141.326,86.36 ; 141.249,86.436 141.402,86.436 ; 141.249,86.512 141.402,86.512 ; 141.249,86.589 141.402,86.589 ; 141.249,86.665 141.326,86.665 ; 141.249,86.741 141.326,86.741 ; 141.326,44.526 141.478,44.526 ; 141.326,44.602 141.478,44.602 ; 141.326,44.679 141.554,44.679 ; 141.326,44.755 141.554,44.755 ; 141.326,44.831 141.554,44.831 ; 141.326,44.907 141.554,44.907 ; 141.326,44.983 141.554,44.983 ; 141.326,45.06 141.554,45.06 ; 141.326,45.136 141.554,45.136 ; 141.326,45.212 141.554,45.212 ; 141.326,45.288 141.554,45.288 ; 141.326,45.364 141.554,45.364 ; 141.326,45.441 141.554,45.441 ; 141.326,45.517 141.554,45.517 ; 141.326,45.593 141.554,45.593 ; 141.326,45.669 141.554,45.669 ; 141.326,66.243 143.307,66.243 ; 141.326,67.843 142.697,67.843 ; 141.326,68.834 142.697,68.834 ; 141.326,68.91 142.697,68.91 ; 141.326,68.986 142.773,68.986 ; 141.326,80.569 141.478,80.569 ; 141.326,80.645 141.402,80.645 ; 141.326,81.712 141.402,81.712 ; 141.326,81.788 141.478,81.788 ; 141.326,82.931 141.478,82.931 ; 141.326,83.007 141.554,83.007 ; 141.326,83.312 141.478,83.312 ; 141.402,45.745 141.554,45.745 ; 141.402,45.822 141.63,45.822 ; 141.402,45.898 141.63,45.898 ; 141.402,45.974 141.63,45.974 ; 141.402,46.05 141.63,46.05 ; 141.402,46.126 141.63,46.126 ; 141.402,46.203 141.63,46.203 ; 141.402,46.279 141.63,46.279 ; 141.402,46.355 141.63,46.355 ; 141.402,69.063 142.85,69.063 ; 141.402,69.139 142.85,69.139 ; 141.402,70.891 142.773,70.891 ; 141.402,79.502 141.63,79.502 ; 141.402,79.578 141.63,79.578 ; 141.402,79.654 142.164,79.654 ; 141.402,79.731 142.011,79.731 ; 141.402,80.493 141.478,80.493 ; 141.402,81.864 141.478,81.864 ; 141.402,83.083 141.63,83.083 ; 141.402,83.388 141.859,83.388 ; 141.478,46.431 141.63,46.431 ; 141.478,46.507 141.63,46.507 ; 141.478,46.584 141.63,46.584 ; 141.478,46.66 141.63,46.66 ; 141.478,46.736 141.63,46.736 ; 141.478,46.812 141.63,46.812 ; 141.478,46.888 141.63,46.888 ; 141.478,46.965 141.63,46.965 ; 141.478,47.041 141.63,47.041 ; 141.478,47.117 141.63,47.117 ; 141.478,47.193 141.63,47.193 ; 141.478,47.269 141.63,47.269 ; 141.478,47.346 141.63,47.346 ; 141.478,47.422 141.63,47.422 ; 141.478,47.498 141.63,47.498 ; 141.478,47.574 141.63,47.574 ; 141.478,47.65 141.63,47.65 ; 141.478,47.727 141.63,47.727 ; 141.478,47.803 141.63,47.803 ; 141.478,47.879 141.63,47.879 ; 141.478,47.955 141.63,47.955 ; 141.478,48.031 141.707,48.031 ; 141.478,48.108 141.707,48.108 ; 141.478,48.184 141.707,48.184 ; 141.478,49.632 141.783,49.632 ; 141.478,49.708 141.783,49.708 ; 141.478,49.784 141.783,49.784 ; 141.478,49.86 141.783,49.86 ; 141.478,49.936 141.783,49.936 ; 141.478,50.013 141.783,50.013 ; 141.478,50.089 141.783,50.089 ; 141.478,66.319 143.459,66.319 ; 141.478,69.215 142.85,69.215 ; 141.478,69.291 142.85,69.291 ; 141.478,69.367 142.85,69.367 ; 141.478,70.663 142.011,70.663 ; 141.478,70.739 142.011,70.739 ; 141.478,70.815 142.773,70.815 ; 141.478,72.492 142.164,72.492 ; 141.478,73.558 143.154,73.558 ; 141.478,78.74 141.783,78.74 ; 141.478,78.816 141.783,78.816 ; 141.478,78.892 141.783,78.892 ; 141.478,78.969 141.783,78.969 ; 141.478,79.045 141.707,79.045 ; 141.478,79.121 141.707,79.121 ; 141.478,79.197 141.707,79.197 ; 141.478,79.273 141.707,79.273 ; 141.478,79.35 141.707,79.35 ; 141.478,79.426 141.707,79.426 ; 141.478,80.34 141.63,80.34 ; 141.478,80.874 141.783,80.874 ; 141.478,81.94 141.554,81.94 ; 141.478,82.017 141.63,82.017 ; 141.478,83.16 141.707,83.16 ; 141.478,83.236 141.707,83.236 ; 141.554,48.26 141.707,48.26 ; 141.554,48.336 141.707,48.336 ; 141.554,48.412 141.707,48.412 ; 141.554,48.489 141.707,48.489 ; 141.554,48.565 141.707,48.565 ; 141.554,48.641 141.707,48.641 ; 141.554,48.717 141.707,48.717 ; 141.554,48.793 141.707,48.793 ; 141.554,48.87 141.783,48.87 ; 141.554,48.946 141.783,48.946 ; 141.554,49.022 141.783,49.022 ; 141.554,49.098 141.783,49.098 ; 141.554,49.174 141.783,49.174 ; 141.554,49.251 141.783,49.251 ; 141.554,49.327 141.783,49.327 ; 141.554,49.403 141.783,49.403 ; 141.554,49.479 141.783,49.479 ; 141.554,49.555 141.783,49.555 ; 141.554,50.165 141.783,50.165 ; 141.554,50.241 141.783,50.241 ; 141.554,50.317 141.783,50.317 ; 141.554,50.394 141.783,50.394 ; 141.554,50.47 141.783,50.47 ; 141.554,50.546 141.783,50.546 ; 141.554,50.622 141.783,50.622 ; 141.554,50.698 141.783,50.698 ; 141.554,50.775 141.783,50.775 ; 141.554,50.851 141.783,50.851 ; 141.554,66.396 143.612,66.396 ; 141.554,69.444 142.85,69.444 ; 141.554,70.51 141.935,70.51 ; 141.554,70.587 142.011,70.587 ; 141.554,78.435 141.783,78.435 ; 141.554,78.511 141.783,78.511 ; 141.554,78.588 141.783,78.588 ; 141.554,78.664 141.783,78.664 ; 141.554,80.264 141.63,80.264 ; 141.554,82.931 141.707,82.931 ; 141.554,83.312 141.783,83.312 ; 141.63,50.927 141.783,50.927 ; 141.63,51.003 141.783,51.003 ; 141.63,51.079 141.783,51.079 ; 141.63,51.156 141.783,51.156 ; 141.63,51.232 141.783,51.232 ; 141.63,51.308 141.783,51.308 ; 141.63,51.384 141.783,51.384 ; 141.63,51.46 141.783,51.46 ; 141.63,51.537 141.783,51.537 ; 141.63,51.613 141.783,51.613 ; 141.63,51.689 141.783,51.689 ; 141.63,51.765 141.783,51.765 ; 141.63,51.841 141.783,51.841 ; 141.63,51.918 141.783,51.918 ; 141.63,51.994 141.783,51.994 ; 141.63,52.07 141.859,52.07 ; 141.63,52.146 141.859,52.146 ; 141.63,52.222 141.859,52.222 ; 141.63,52.299 141.859,52.299 ; 141.63,52.375 141.859,52.375 ; 141.63,52.451 141.859,52.451 ; 141.63,52.527 141.859,52.527 ; 141.63,52.603 141.859,52.603 ; 141.63,52.68 141.859,52.68 ; 141.63,52.756 141.859,52.756 ; 141.63,52.832 141.859,52.832 ; 141.63,52.908 141.859,52.908 ; 141.63,52.984 141.859,52.984 ; 141.63,53.061 141.859,53.061 ; 141.63,66.472 143.612,66.472 ; 141.63,67.92 142.697,67.92 ; 141.63,69.52 142.85,69.52 ; 141.63,69.596 142.85,69.596 ; 141.63,69.672 142.85,69.672 ; 141.63,70.358 141.859,70.358 ; 141.63,70.434 141.935,70.434 ; 141.63,77.292 141.859,77.292 ; 141.63,77.368 141.859,77.368 ; 141.63,77.445 141.859,77.445 ; 141.63,77.521 141.859,77.521 ; 141.63,77.597 141.859,77.597 ; 141.63,77.673 141.859,77.673 ; 141.63,77.749 141.859,77.749 ; 141.63,77.826 141.783,77.826 ; 141.63,77.902 141.783,77.902 ; 141.63,77.978 141.783,77.978 ; 141.63,78.054 141.783,78.054 ; 141.63,78.13 141.783,78.13 ; 141.63,78.207 141.783,78.207 ; 141.63,78.283 141.783,78.283 ; 141.63,78.359 141.783,78.359 ; 141.63,80.112 141.783,80.112 ; 141.63,80.188 141.707,80.188 ; 141.63,82.093 141.707,82.093 ; 141.63,82.169 141.783,82.169 ; 141.63,83.464 141.935,83.464 ; 141.707,53.137 141.859,53.137 ; 141.707,53.213 141.935,53.213 ; 141.707,53.289 141.935,53.289 ; 141.707,53.365 141.935,53.365 ; 141.707,53.442 141.935,53.442 ; 141.707,53.518 141.935,53.518 ; 141.707,53.594 141.935,53.594 ; 141.707,53.67 141.935,53.67 ; 141.707,53.746 141.935,53.746 ; 141.707,53.823 141.935,53.823 ; 141.707,53.899 141.935,53.899 ; 141.707,53.975 141.935,53.975 ; 141.707,54.051 141.935,54.051 ; 141.707,54.127 141.935,54.127 ; 141.707,54.204 141.935,54.204 ; 141.707,54.28 141.935,54.28 ; 141.707,54.356 141.935,54.356 ; 141.707,76.606 141.935,76.606 ; 141.707,76.683 141.935,76.683 ; 141.707,76.759 141.935,76.759 ; 141.707,76.835 141.935,76.835 ; 141.707,76.911 141.935,76.911 ; 141.707,76.987 141.935,76.987 ; 141.707,77.064 141.935,77.064 ; 141.707,77.14 141.859,77.14 ; 141.707,77.216 141.859,77.216 ; 141.707,80.797 141.935,80.797 ; 141.707,82.245 141.783,82.245 ; 141.707,83.007 141.859,83.007 ; 141.783,54.432 141.935,54.432 ; 141.783,54.508 141.935,54.508 ; 141.783,54.585 141.935,54.585 ; 141.783,54.661 141.935,54.661 ; 141.783,54.737 141.935,54.737 ; 141.783,54.813 141.935,54.813 ; 141.783,54.889 141.935,54.889 ; 141.783,54.966 141.935,54.966 ; 141.783,55.042 141.935,55.042 ; 141.783,55.118 141.935,55.118 ; 141.783,55.194 141.935,55.194 ; 141.783,55.27 141.935,55.27 ; 141.783,55.347 141.935,55.347 ; 141.783,55.423 141.935,55.423 ; 141.783,55.499 141.859,55.499 ; 141.783,55.575 141.859,55.575 ; 141.783,55.651 141.859,55.651 ; 141.783,55.728 141.859,55.728 ; 141.783,55.804 141.859,55.804 ; 141.783,55.88 141.859,55.88 ; 141.783,66.548 143.688,66.548 ; 141.783,67.996 142.773,67.996 ; 141.783,69.748 142.85,69.748 ; 141.783,69.825 142.85,69.825 ; 141.783,75.082 142.011,75.082 ; 141.783,75.159 142.011,75.159 ; 141.783,75.235 142.011,75.235 ; 141.783,75.311 142.011,75.311 ; 141.783,75.387 142.011,75.387 ; 141.783,75.463 142.011,75.463 ; 141.783,75.54 142.011,75.54 ; 141.783,75.616 142.011,75.616 ; 141.783,75.692 141.935,75.692 ; 141.783,75.768 141.935,75.768 ; 141.783,75.844 141.935,75.844 ; 141.783,75.921 141.935,75.921 ; 141.783,75.997 141.935,75.997 ; 141.783,76.073 141.935,76.073 ; 141.783,76.149 141.935,76.149 ; 141.783,76.225 141.935,76.225 ; 141.783,76.302 141.935,76.302 ; 141.783,76.378 141.935,76.378 ; 141.783,76.454 141.935,76.454 ; 141.783,76.53 141.935,76.53 ; 141.783,79.502 142.088,79.502 ; 141.783,79.578 141.935,79.578 ; 141.783,79.959 142.088,79.959 ; 141.783,80.035 141.859,80.035 ; 141.783,80.721 142.011,80.721 ; 141.783,82.321 141.859,82.321 ; 141.783,82.398 141.935,82.398 ; 141.783,83.083 141.935,83.083 ; 141.783,83.541 142.011,83.541 ; 141.859,58.471 142.088,58.471 ; 141.859,58.547 142.088,58.547 ; 141.859,58.623 142.088,58.623 ; 141.859,58.699 142.088,58.699 ; 141.859,58.776 142.088,58.776 ; 141.859,66.624 143.764,66.624 ; 141.859,69.901 142.85,69.901 ; 141.859,73.482 143.231,73.482 ; 141.859,75.006 142.011,75.006 ; 141.859,82.474 142.011,82.474 ; 141.859,83.617 142.164,83.617 ; 141.935,57.861 142.088,57.861 ; 141.935,57.937 142.088,57.937 ; 141.935,58.014 142.088,58.014 ; 141.935,58.09 142.088,58.09 ; 141.935,58.166 142.088,58.166 ; 141.935,58.242 142.088,58.242 ; 141.935,58.318 142.088,58.318 ; 141.935,58.395 142.088,58.395 ; 141.935,58.852 142.088,58.852 ; 141.935,58.928 142.088,58.928 ; 141.935,59.004 142.088,59.004 ; 141.935,59.08 142.088,59.08 ; 141.935,59.157 142.088,59.157 ; 141.935,59.233 142.088,59.233 ; 141.935,59.309 142.088,59.309 ; 141.935,59.385 142.088,59.385 ; 141.935,59.461 142.088,59.461 ; 141.935,59.538 142.088,59.538 ; 141.935,59.614 142.088,59.614 ; 141.935,59.69 142.088,59.69 ; 141.935,59.766 142.088,59.766 ; 141.935,59.842 142.088,59.842 ; 141.935,59.919 142.088,59.919 ; 141.935,59.995 142.088,59.995 ; 141.935,60.071 142.088,60.071 ; 141.935,60.147 142.088,60.147 ; 141.935,60.223 142.088,60.223 ; 141.935,60.3 142.088,60.3 ; 141.935,60.376 142.088,60.376 ; 141.935,60.452 142.088,60.452 ; 141.935,60.528 142.088,60.528 ; 141.935,60.604 142.088,60.604 ; 141.935,60.681 142.088,60.681 ; 141.935,60.757 142.088,60.757 ; 141.935,60.833 142.088,60.833 ; 141.935,60.909 142.088,60.909 ; 141.935,60.985 142.088,60.985 ; 141.935,61.062 142.088,61.062 ; 141.935,61.138 142.088,61.138 ; 141.935,61.214 142.088,61.214 ; 141.935,61.29 142.088,61.29 ; 141.935,61.366 142.088,61.366 ; 141.935,61.443 142.088,61.443 ; 141.935,61.519 142.088,61.519 ; 141.935,61.595 142.088,61.595 ; 141.935,61.671 142.088,61.671 ; 141.935,61.747 142.088,61.747 ; 141.935,61.824 142.088,61.824 ; 141.935,61.9 142.088,61.9 ; 141.935,61.976 142.088,61.976 ; 141.935,62.052 142.088,62.052 ; 141.935,62.128 142.164,62.128 ; 141.935,62.205 142.164,62.205 ; 141.935,62.281 142.164,62.281 ; 141.935,62.357 142.164,62.357 ; 141.935,62.433 142.164,62.433 ; 141.935,62.509 142.164,62.509 ; 141.935,62.586 142.164,62.586 ; 141.935,62.662 142.164,62.662 ; 141.935,62.738 142.164,62.738 ; 141.935,62.814 142.164,62.814 ; 141.935,62.89 142.164,62.89 ; 141.935,62.967 142.164,62.967 ; 141.935,69.977 142.85,69.977 ; 141.935,70.053 142.85,70.053 ; 141.935,70.129 142.85,70.129 ; 141.935,79.426 142.164,79.426 ; 141.935,80.645 142.164,80.645 ; 141.935,82.55 142.088,82.55 ; 141.935,83.16 142.24,83.16 ; 141.935,83.693 142.24,83.693 ; 142.011,57.785 142.088,57.785 ; 142.011,63.043 142.164,63.043 ; 142.011,63.119 142.164,63.119 ; 142.011,63.195 142.164,63.195 ; 142.011,63.271 142.164,63.271 ; 142.011,63.348 142.164,63.348 ; 142.011,63.424 142.164,63.424 ; 142.011,63.5 142.164,63.5 ; 142.011,63.576 142.164,63.576 ; 142.011,63.652 142.164,63.652 ; 142.011,63.729 142.164,63.729 ; 142.011,63.805 142.164,63.805 ; 142.011,63.881 142.164,63.881 ; 142.011,63.957 142.164,63.957 ; 142.011,64.033 142.164,64.033 ; 142.011,64.11 142.164,64.11 ; 142.011,64.186 142.164,64.186 ; 142.011,64.262 142.164,64.262 ; 142.011,64.338 142.164,64.338 ; 142.011,64.414 142.164,64.414 ; 142.011,64.491 142.164,64.491 ; 142.011,64.567 142.164,64.567 ; 142.011,64.643 142.164,64.643 ; 142.011,64.719 142.164,64.719 ; 142.011,64.795 142.164,64.795 ; 142.011,64.872 142.164,64.872 ; 142.011,64.948 142.164,64.948 ; 142.011,65.024 142.164,65.024 ; 142.011,65.1 142.164,65.1 ; 142.011,65.176 142.164,65.176 ; 142.011,65.253 142.164,65.253 ; 142.011,65.329 142.164,65.329 ; 142.011,65.405 142.164,65.405 ; 142.011,65.481 142.164,65.481 ; 142.011,65.557 142.164,65.557 ; 142.011,65.634 142.164,65.634 ; 142.011,66.7 143.84,66.7 ; 142.011,70.206 142.85,70.206 ; 142.011,70.282 142.85,70.282 ; 142.011,70.358 142.85,70.358 ; 142.011,70.434 142.85,70.434 ; 142.011,79.35 142.24,79.35 ; 142.011,79.883 142.164,79.883 ; 142.011,80.569 142.24,80.569 ; 142.011,82.626 142.24,82.626 ; 142.088,56.49 142.164,56.49 ; 142.088,66.777 143.84,66.777 ; 142.088,68.072 142.773,68.072 ; 142.088,70.51 142.85,70.51 ; 142.088,70.587 142.85,70.587 ; 142.088,70.663 142.773,70.663 ; 142.088,70.739 142.773,70.739 ; 142.088,71.425 142.697,71.425 ; 142.088,71.501 142.697,71.501 ; 142.088,71.577 142.621,71.577 ; 142.088,71.653 142.621,71.653 ; 142.088,71.73 142.545,71.73 ; 142.088,71.806 142.545,71.806 ; 142.088,71.882 142.545,71.882 ; 142.088,73.101 142.545,73.101 ; 142.088,73.177 142.469,73.177 ; 142.088,73.406 143.307,73.406 ; 142.088,79.578 142.621,79.578 ; 142.088,79.807 142.24,79.807 ; 142.088,80.493 142.392,80.493 ; 142.088,81.788 142.24,81.788 ; 142.088,81.864 142.24,81.864 ; 142.088,81.94 142.24,81.94 ; 142.088,82.017 142.24,82.017 ; 142.088,83.236 142.316,83.236 ; 142.164,66.853 143.916,66.853 ; 142.164,71.958 142.469,71.958 ; 142.164,72.034 142.392,72.034 ; 142.164,72.111 142.316,72.111 ; 142.164,72.949 142.85,72.949 ; 142.164,73.025 142.697,73.025 ; 142.164,79.273 142.392,79.273 ; 142.164,81.636 142.24,81.636 ; 142.164,81.712 142.24,81.712 ; 142.164,82.093 142.316,82.093 ; 142.24,56.261 142.316,56.261 ; 142.24,56.337 142.316,56.337 ; 142.24,56.413 142.392,56.413 ; 142.24,56.49 142.392,56.49 ; 142.24,56.566 142.469,56.566 ; 142.24,66.929 143.916,66.929 ; 142.24,68.148 142.773,68.148 ; 142.24,72.644 143.154,72.644 ; 142.24,72.72 143.154,72.72 ; 142.24,72.796 143.002,72.796 ; 142.24,72.873 142.926,72.873 ; 142.24,79.197 142.469,79.197 ; 142.24,79.502 143.993,79.502 ; 142.24,79.654 142.392,79.654 ; 142.24,79.731 142.316,79.731 ; 142.24,80.416 142.773,80.416 ; 142.24,81.407 142.392,81.407 ; 142.24,81.483 142.392,81.483 ; 142.24,81.559 142.316,81.559 ; 142.24,82.169 142.392,82.169 ; 142.24,82.245 142.545,82.245 ; 142.24,82.321 142.545,82.321 ; 142.24,82.702 143.383,82.702 ; 142.24,83.312 142.545,83.312 ; 142.24,83.769 142.392,83.769 ; 142.24,83.845 142.545,83.845 ; 142.316,56.642 142.545,56.642 ; 142.316,72.568 143.307,72.568 ; 142.316,81.331 142.392,81.331 ; 142.392,56.718 142.545,56.718 ; 142.392,56.794 142.545,56.794 ; 142.392,56.871 142.621,56.871 ; 142.392,56.947 142.697,56.947 ; 142.392,67.005 143.993,67.005 ; 142.392,67.081 144.069,67.081 ; 142.392,68.224 142.85,68.224 ; 142.392,72.339 143.459,72.339 ; 142.392,72.415 143.459,72.415 ; 142.392,72.492 143.307,72.492 ; 142.392,73.33 143.307,73.33 ; 142.392,79.045 142.621,79.045 ; 142.392,79.121 142.545,79.121 ; 142.392,80.34 142.697,80.34 ; 142.392,81.178 142.545,81.178 ; 142.392,81.255 142.469,81.255 ; 142.392,82.398 142.469,82.398 ; 142.392,82.474 142.545,82.474 ; 142.392,83.388 142.697,83.388 ; 142.469,57.023 142.697,57.023 ; 142.469,72.263 143.535,72.263 ; 142.469,73.254 143.307,73.254 ; 142.469,80.264 142.85,80.264 ; 142.469,82.55 142.697,82.55 ; 142.545,57.099 142.697,57.099 ; 142.545,57.175 142.773,57.175 ; 142.545,67.158 144.069,67.158 ; 142.545,67.234 144.145,67.234 ; 142.545,68.301 142.85,68.301 ; 142.545,72.187 143.612,72.187 ; 142.545,78.969 142.85,78.969 ; 142.545,81.026 143.078,81.026 ; 142.545,81.102 142.621,81.102 ; 142.545,82.398 142.85,82.398 ; 142.545,82.626 142.773,82.626 ; 142.545,83.464 143.916,83.464 ; 142.545,83.922 142.697,83.922 ; 142.621,57.252 142.773,57.252 ; 142.621,68.377 142.85,68.377 ; 142.621,72.034 143.612,72.034 ; 142.621,72.111 143.612,72.111 ; 142.621,78.892 143.154,78.892 ; 142.621,80.95 142.85,80.95 ; 142.621,81.636 142.697,81.636 ; 142.621,81.712 142.697,81.712 ; 142.621,81.788 142.697,81.788 ; 142.697,57.328 142.85,57.328 ; 142.697,57.404 142.85,57.404 ; 142.697,67.31 144.221,67.31 ; 142.697,68.453 142.85,68.453 ; 142.697,71.882 143.764,71.882 ; 142.697,71.958 143.688,71.958 ; 142.697,73.177 143.383,73.177 ; 142.697,78.74 142.773,78.74 ; 142.697,80.188 143.078,80.188 ; 142.697,80.493 142.926,80.493 ; 142.697,80.874 142.85,80.874 ; 142.697,81.331 142.773,81.331 ; 142.697,81.407 142.773,81.407 ; 142.697,81.483 142.773,81.483 ; 142.697,81.559 143.002,81.559 ; 142.697,81.864 142.773,81.864 ; 142.697,81.94 142.85,81.94 ; 142.697,83.998 142.85,83.998 ; 142.773,57.48 142.926,57.48 ; 142.773,60.528 142.926,60.528 ; 142.773,60.604 142.926,60.604 ; 142.773,60.681 142.85,60.681 ; 142.773,60.757 142.85,60.757 ; 142.773,67.386 144.221,67.386 ; 142.773,71.653 143.916,71.653 ; 142.773,71.73 143.764,71.73 ; 142.773,71.806 143.764,71.806 ; 142.773,73.101 143.459,73.101 ; 142.773,80.797 143.002,80.797 ; 142.773,81.255 142.85,81.255 ; 142.773,81.636 142.926,81.636 ; 142.773,82.017 143.383,82.017 ; 142.85,57.556 142.926,57.556 ; 142.85,57.633 143.002,57.633 ; 142.85,57.709 143.002,57.709 ; 142.85,60.071 143.078,60.071 ; 142.85,60.147 143.078,60.147 ; 142.85,60.223 143.002,60.223 ; 142.85,60.3 143.002,60.3 ; 142.85,60.376 143.002,60.376 ; 142.85,60.452 143.002,60.452 ; 142.85,60.833 142.926,60.833 ; 142.85,60.909 142.926,60.909 ; 142.85,67.462 144.221,67.462 ; 142.85,67.691 142.926,67.691 ; 142.85,70.815 144.221,70.815 ; 142.85,70.891 144.221,70.891 ; 142.85,70.968 144.221,70.968 ; 142.85,71.044 144.221,71.044 ; 142.85,71.12 144.145,71.12 ; 142.85,71.196 144.145,71.196 ; 142.85,71.272 144.069,71.272 ; 142.85,71.349 144.069,71.349 ; 142.85,71.425 143.993,71.425 ; 142.85,71.501 143.993,71.501 ; 142.85,71.577 143.916,71.577 ; 142.85,78.816 143.612,78.816 ; 142.85,80.721 143.154,80.721 ; 142.85,81.178 143.535,81.178 ; 142.85,81.483 143.078,81.483 ; 142.85,81.712 142.926,81.712 ; 142.85,81.788 143.002,81.788 ; 142.85,81.864 143.002,81.864 ; 142.85,82.779 143.231,82.779 ; 142.926,57.785 143.078,57.785 ; 142.926,59.919 143.231,59.919 ; 142.926,59.995 143.154,59.995 ; 142.926,60.985 143.002,60.985 ; 142.926,61.062 143.002,61.062 ; 142.926,61.138 143.078,61.138 ; 142.926,61.214 143.078,61.214 ; 142.926,67.767 143.078,67.767 ; 142.926,67.843 143.154,67.843 ; 142.926,70.358 144.221,70.358 ; 142.926,70.434 144.221,70.434 ; 142.926,70.51 144.221,70.51 ; 142.926,70.587 144.221,70.587 ; 142.926,70.663 144.221,70.663 ; 142.926,70.739 144.221,70.739 ; 142.926,73.025 143.459,73.025 ; 142.926,80.112 143.231,80.112 ; 142.926,80.569 143.154,80.569 ; 142.926,81.102 143.383,81.102 ; 142.926,81.94 143.078,81.94 ; 143.002,57.861 143.078,57.861 ; 143.002,57.937 143.154,57.937 ; 143.002,58.014 143.154,58.014 ; 143.002,59.766 143.307,59.766 ; 143.002,59.842 143.307,59.842 ; 143.002,61.29 143.078,61.29 ; 143.002,61.366 143.078,61.366 ; 143.002,61.443 143.078,61.443 ; 143.002,61.519 143.154,61.519 ; 143.002,61.595 143.154,61.595 ; 143.002,61.671 143.154,61.671 ; 143.002,61.747 143.154,61.747 ; 143.002,61.824 143.154,61.824 ; 143.002,67.539 144.221,67.539 ; 143.002,67.92 143.231,67.92 ; 143.002,67.996 143.307,67.996 ; 143.002,68.072 143.383,68.072 ; 143.002,68.148 143.459,68.148 ; 143.002,68.224 143.535,68.224 ; 143.002,68.301 143.612,68.301 ; 143.002,68.377 143.612,68.377 ; 143.002,68.453 143.612,68.453 ; 143.002,68.529 143.688,68.529 ; 143.002,68.605 143.764,68.605 ; 143.002,68.682 143.764,68.682 ; 143.002,68.758 143.764,68.758 ; 143.002,68.834 143.764,68.834 ; 143.002,68.91 143.764,68.91 ; 143.002,69.291 143.916,69.291 ; 143.002,69.367 143.916,69.367 ; 143.002,69.444 143.993,69.444 ; 143.002,69.52 144.069,69.52 ; 143.002,69.596 144.069,69.596 ; 143.002,69.672 144.145,69.672 ; 143.002,69.748 144.221,69.748 ; 143.002,69.825 144.221,69.825 ; 143.002,69.901 144.221,69.901 ; 143.002,69.977 144.221,69.977 ; 143.002,70.053 144.221,70.053 ; 143.002,70.129 144.221,70.129 ; 143.002,70.206 144.221,70.206 ; 143.002,70.282 144.221,70.282 ; 143.002,72.949 143.459,72.949 ; 143.002,79.578 144.069,79.578 ; 143.002,80.645 143.307,80.645 ; 143.002,84.074 143.231,84.074 ; 143.078,58.09 143.231,58.09 ; 143.078,58.166 143.307,58.166 ; 143.078,61.9 143.154,61.9 ; 143.078,61.976 143.307,61.976 ; 143.078,67.615 144.297,67.615 ; 143.078,68.986 143.84,68.986 ; 143.078,69.063 143.84,69.063 ; 143.078,69.139 143.916,69.139 ; 143.078,69.215 143.916,69.215 ; 143.078,82.321 143.535,82.321 ; 143.154,58.242 143.307,58.242 ; 143.154,58.318 143.307,58.318 ; 143.154,59.69 143.459,59.69 ; 143.154,62.052 143.307,62.052 ; 143.154,62.128 143.307,62.128 ; 143.154,67.691 144.374,67.691 ; 143.154,72.873 143.459,72.873 ; 143.154,82.626 143.84,82.626 ; 143.154,84.15 143.612,84.15 ; 143.231,58.395 143.459,58.395 ; 143.231,58.471 143.459,58.471 ; 143.231,59.614 143.535,59.614 ; 143.231,61.9 143.383,61.9 ; 143.231,62.205 143.307,62.205 ; 143.231,62.281 143.383,62.281 ; 143.231,80.035 143.916,80.035 ; 143.231,80.721 143.459,80.721 ; 143.231,81.407 143.307,81.407 ; 143.307,58.547 143.535,58.547 ; 143.307,58.623 143.612,58.623 ; 143.307,59.538 143.612,59.538